# Altium PCB CANSAT_Telemetry_schematic_PCB.PcbDoc
Units mil, origin at the board's own origin, x right, y up, seen from the top; angles counter-clockwise.
Board outline 6000 x 4000 mil, 2 copper layers (Top Layer, Bottom Layer); 10 components, 14 nets, 88 pads, 0 vias.
Unrouted connection lines stored in the file: 34.
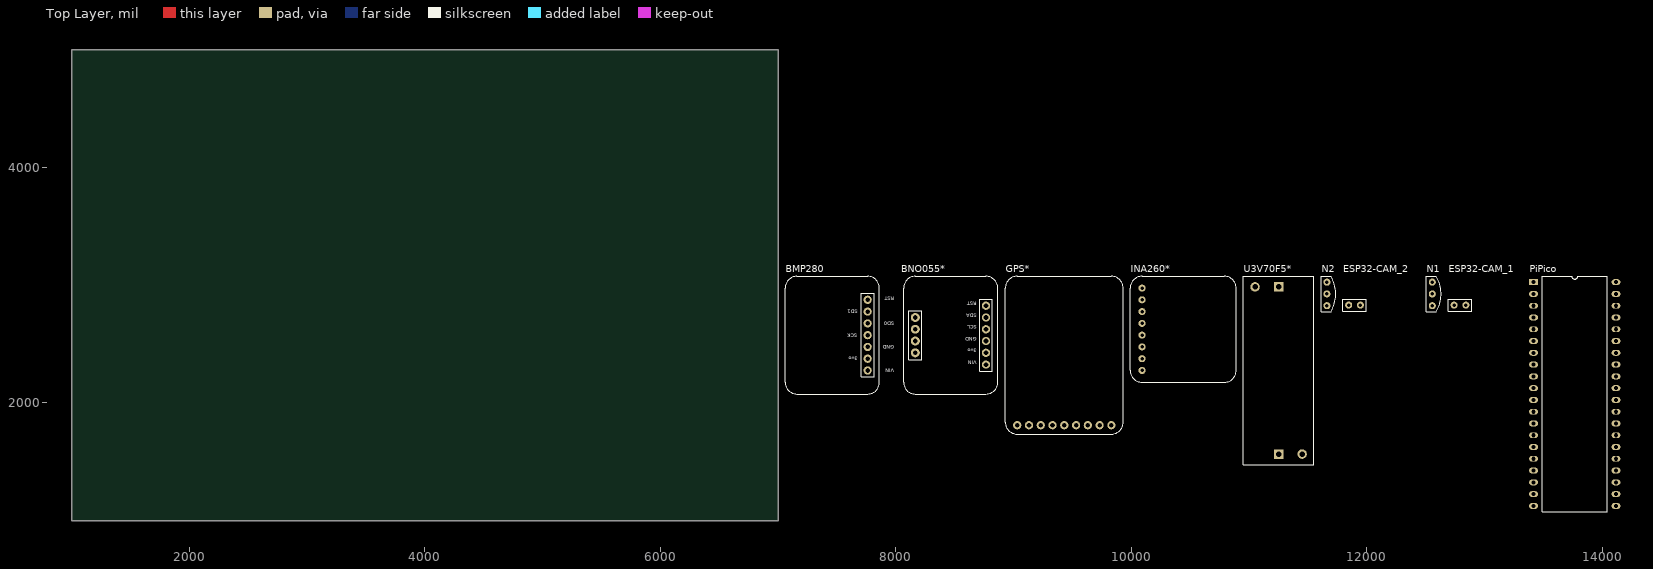
[diagram p0: Top Layer view]
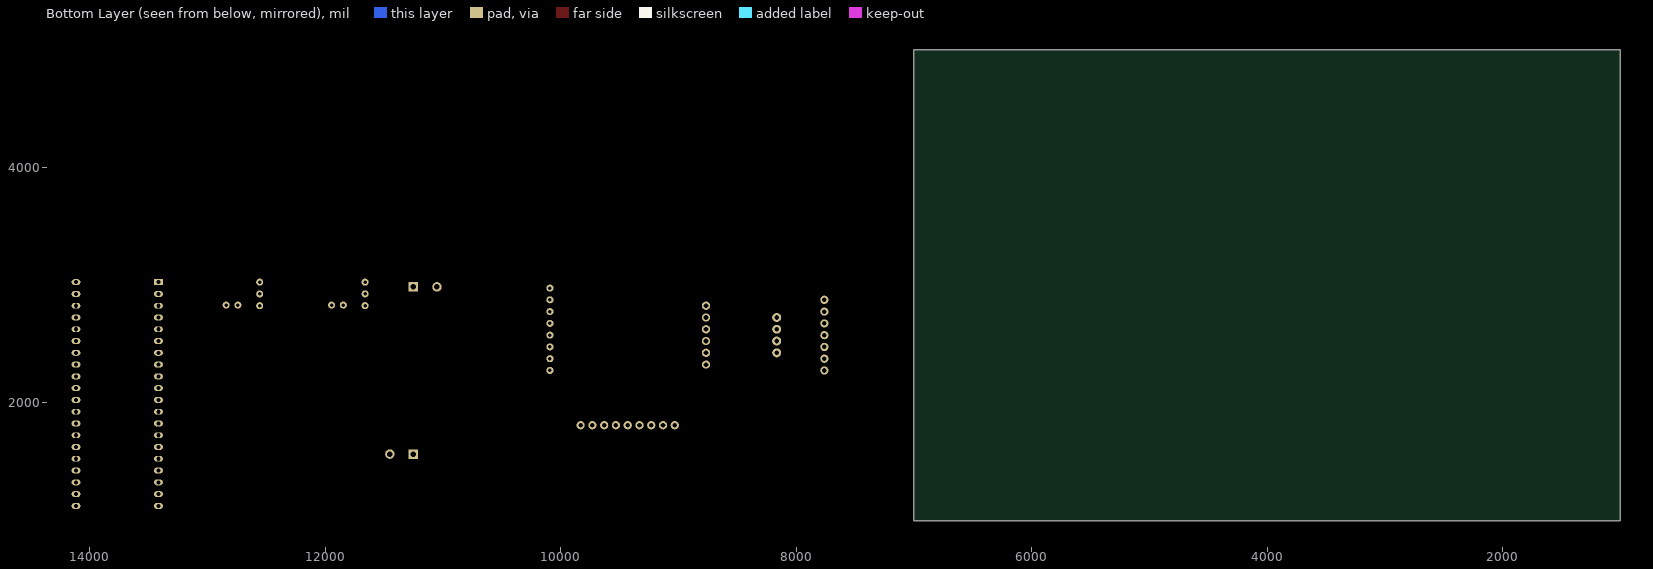
[diagram p1: Bottom Layer view, seen from below]

## Layer stack, top to bottom
Top Solder: solder mask 0.4, Solder Resist, Dk 3.5
Top Layer: signal copper 1.4
Dielectric 1: dielectric 12.6, FR-4, Dk 4.8
Bottom Layer: signal copper 1.4
Bottom Solder: solder mask 0.4, Solder Resist, Dk 3.5

## Board outline
1000,1000 7000,1000 7000,5000 1000,5000

## Design rules (kind name [scope] priority, off if disabled: settings)
Clearance [All] p1: gap=10 ignorepadtopadclearanceinfootprint=FALSE
PolygonConnect [All] p1: connectstyle=Relief reliefconductorwidth=10 reliefentries=4 polygonreliefangle="90 Angle" airgapwidth=10
RoutingVias [All] p1: holewidth=28 width=50 viastyle="Through Hole" minholewidth=28 minwidth=50 maxholewidth=28 maxwidth=50
SolderMaskExpansion [All] p1: expansion=4 istentingtop=FALSE
SupplyNets "Schematic Supply Nets_1" [InNet('+5')] p1: voltage=0.000
SupplyNets "Schematic Supply Nets" [InNet('GND')] p2: voltage=0.000
Width [All] p1: maxlimit=10 minlimit=10 preferedwidth=10
30 further rules are at their usual default settings.

## Components (designator, comment, footprint, x,y, rotation, side; value= is the part's Value field where it differs from the comment)
BMP280 "BMP280" BMP280_BreakoutBoard 7760,2175 r90 top
BNO055* "BNO055*" BNO055_BreakoutBoard 8485,2585 r90 top
ESP32-CAM_1 "ESP32-CAM_1" ESP32-CAM 12840,2830 r90 top
ESP32-CAM_2 "ESP32-CAM_2" ESP32-CAM 11945,2830 r90 top
GPS* "GPS*" AdafruitUltimateGPS 8930,1735 r0 top
INA260* "INA260*" INA260_Breakout 10440,2625 r0 top
N1 "2N7000" 2N7000 12555,2925 r0 top
N2 "2N7000" 2N7000 11660,2925 r0 top
PiPico "Raspberry Pi Pico" "Raspberry Pi Pico" 13415,3025 r0 top
U3V70F5* "U3V70F5*" U3V70F5 11250,2275 r90 top

## Footprints (in the part's own frame and the unit in brackets; to place one, negate y for a bottom-side part, rotate by r counter-clockwise, add the part's x,y. Pads: shape width x height; smd on the part's side, far side on the other; paste and mask are expansions set on the pad)
2N7000 [mil]
  round 60 hole 30: D(0,-100) G(0,0) S(0,100)
  silkscreen extent -50,-150 75,150
AdafruitUltimateGPS [mil]
  round 70 hole 39.36 paste-99999 mask+4: 3V3(100,75) EN(200,75) FIX(400,75) GND(700,75) PPS(900,75) RX(600,75) TX(500,75) VBAT(300,75) VIN(800,75)
  silkscreen extent 0,0 1000,1340
BMP280_BreakoutBoard [mil]
  round 70 hole 39.36 paste-99999 mask+4: 3vo(200,0) GND(300,0) RST(700,0) SCK(400,0) SD0(500,0) SD1(600,0) VIN(100,0)
  silkscreen extent -100,-100 900,700
BNO055_BreakoutBoard [mil]
  round 70 hole 39.36 paste-99999 mask+4: 3vo(-160,-280) GND(-60,-280) RST(240,-280) SCL(40,-280) SDA(140,-280) VIN(-260,-280)
  round 76 hole 39.36 paste-99999 mask+4: ADR(140,320) INT(40,320) PS0(-160,320) PS1(-60,320)
  silkscreen extent -510,-380 490,420
ESP32-CAM [mil]
  round 60 hole 30: 5V(0,100) GND(0,0)
  silkscreen extent -50,-50 50,150
INA260_Breakout [mil] "Voltage Sensor"
  round 60 hole 30: ALERT(-350,-50) GND(-350,250) SCL(-350,150) SDA(-350,50) VBUS(-350,-150) VCC(-350,350) VIN+(-350,-250) VIN-(-350,-350)
  silkscreen extent -450,-450 450,450
"Raspberry Pi Pico" [mil]
  rect 75x50 hole 35: 1(0,0)
  oval 75x50 hole 35: 2(0,-100) 3(0,-200) 4(0,-300) 5(0,-400) 6(0,-500) 7(0,-600) 8(0,-700) 9(0,-800) 10(0,-900) 11(0,-1000) 12(0,-1100) 13(0,-1200) 14(0,-1300) 15(0,-1400) 16(0,-1500) 17(0,-1600) 18(0,-1700) 19(0,-1800) 20(0,-1900) 21(700,-1900) 22(700,-1800) 23(700,-1700) 24(700,-1600) 25(700,-1500) 26(700,-1400) 27(700,-1300) 28(700,-1200) 29(700,-1100) 30(700,-1000) 31(700,-900) 32(700,-800) 33(700,-700) 34(700,-600) 35(700,-500) 36(700,-400) 37(700,-300) 38(700,-200) 39(700,-100) 40(700,0)
  silkscreen extent 72,-1950 628,50
U3V70F5 [mil] "Boost Regulator: 5V"
  round 80 hole 47: GND_IN(-710,-200) VOUT_5V(710,200)
  rect 80x80 hole 47: GND_OUT(710,0) VIN(-710,0)
  silkscreen extent -800,-300 800,300

## Part data
BMP280: library part BMP280_BreakoutBoard
BNO055*: library part BNO055
ESP32-CAM_1 ESP32-CAM_2: library part ESP32-CAM
GPS*: library part AdafruitUltimateGPS
INA260*: library part INA260_Breakout
U3V70F5*: library part U3V70F5, "Boost Regulator: 5V"

## Nets (pads, with @x,y where several pads share a name; then routed paths per layer and width w, separated by ;. In a path a pad name is that pad's centre, name@x,y a point inside that pad or via, vN(x,y) a via of type N, cw(c..) or ccw(c..) an arc to the next point about the centre after c; other vN are vias at no path point)
3V3: BMP280.VIN BNO055*.VIN GPS*.VIN INA260*.VCC PiPico.36
+5: ESP32-CAM_1.5V ESP32-CAM_2.5V PiPico.39 U3V70F5*.VOUT_5V
BAT_3V7: INA260*.VIN+ U3V70F5*.VIN
GND: BMP280.GND BNO055*.GND GPS*.GND INA260*.GND INA260*.VIN- N1.S N2.S PiPico.3 PiPico.8 PiPico.13 PiPico.18 PiPico.23 PiPico.28 PiPico.33 PiPico.38 U3V70F5*.GND_IN U3V70F5*.GND_OUT
GP8_SDA: BMP280.SD1 PiPico.11
GP9_SCL: BMP280.SCK PiPico.12
GP12_TX: GPS*.TX PiPico.16
GP13_RX: GPS*.RX PiPico.17
GP16_SDA: BNO055*.SDA PiPico.21
GP17_SCL: BNO055*.SCL PiPico.22
GP20_SDA: INA260*.SDA PiPico.26
GP21_SCL: INA260*.SCL PiPico.27
NetESP32-CAM_1_GND: ESP32-CAM_1.GND N1.D
NetESP32-CAM_2_GND: ESP32-CAM_2.GND N2.D
pads on no net: BMP280.3vo BMP280.RST BMP280.SD0 BNO055*.3vo BNO055*.ADR BNO055*.INT BNO055*.PS0 BNO055*.PS1 BNO055*.RST GPS*.3V3 GPS*.EN GPS*.FIX GPS*.PPS GPS*.VBAT INA260*.ALERT INA260*.VBUS N1.G N2.G PiPico.1 PiPico.2 PiPico.4 PiPico.5 PiPico.6 PiPico.7 PiPico.9 PiPico.10 PiPico.14 PiPico.15 PiPico.19 PiPico.20 PiPico.24 PiPico.25 PiPico.29 PiPico.30 PiPico.31 PiPico.32 PiPico.34 PiPico.35 PiPico.37 PiPico.40

## Text inside footprints (layer, text, board x,y; h text height)
BMP280: Top Overlay "SD1" at 7676.06,2791.06 h31.5 r180; Top Overlay "VIN" at 7985,2290.75 h31.5 r180; Top Overlay "SD0" at 7985,2690.75 h31.5 r180; Top Overlay "SCK" at 7671.06,2586.06 h31.5 r180; Top Overlay "3vo" at 7676.06,2391.06 h31.5 r180; Top Overlay "GND" at 7985,2490.75 h31.5 r180; Top Overlay "RST" at 7984.01,2902.24 h31.5 r180
BNO055*: Top Overlay "RST" at 8685,2860.75 h31.5 r180; Top Overlay "SDA" at 8685,2755.75 h31.5 r180; Top Overlay "SCL" at 8685,2660.75 h31.5 r180; Top Overlay "3vo" at 8685,2460.75 h31.5 r180; Top Overlay "GND" at 8685,2555.75 h31.5 r180; Top Overlay "VIN" at 8685,2355.75 h31.5 r180
ESP32-CAM_1: Mechanical 1 "5V" at 12755,2895 h60 r90; Mechanical 1 "GND" at 12880,2900 h60 r90
ESP32-CAM_2: Mechanical 1 "5V" at 11860,2895 h60 r90; Mechanical 1 "GND" at 11985,2900 h60 r90
GPS*: Mechanical 1 "PPS" at 9865,1885 h60 r90; Mechanical 1 "VIN" at 9765,1890 h60 r90; Mechanical 1 "GND" at 9660,1890 h60 r90; Mechanical 1 "RX" at 9560,1890 h60 r90; Mechanical 1 "TX" at 9465,1885 h60 r90; Mechanical 1 "FIX" at 9360,1885 h60 r90; Mechanical 1 "VBAT" at 9265,1885 h60 r90; Mechanical 1 "EN" at 9165,1885 h60 r90; Mechanical 1 "3V3" at 9060,1885 h60 r90; Mechanical 1 "Ultimate GPS" at 9100,2595 h60; Mechanical 1 "Adafruit" at 9240,2745 h60
U3V70F5*: Mechanical 1 "GND" at 11475,1690 h60 r90; Mechanical 1 "VIN" at 11280,1690 h60 r90; Mechanical 1 "GND" at 11275,2720 h60 r90; Mechanical 1 "5V" at 11085,2795 h60 r90